# EAGLE board AMS Segment rev16 (EAGLE 9.6.2), part 1 of 2
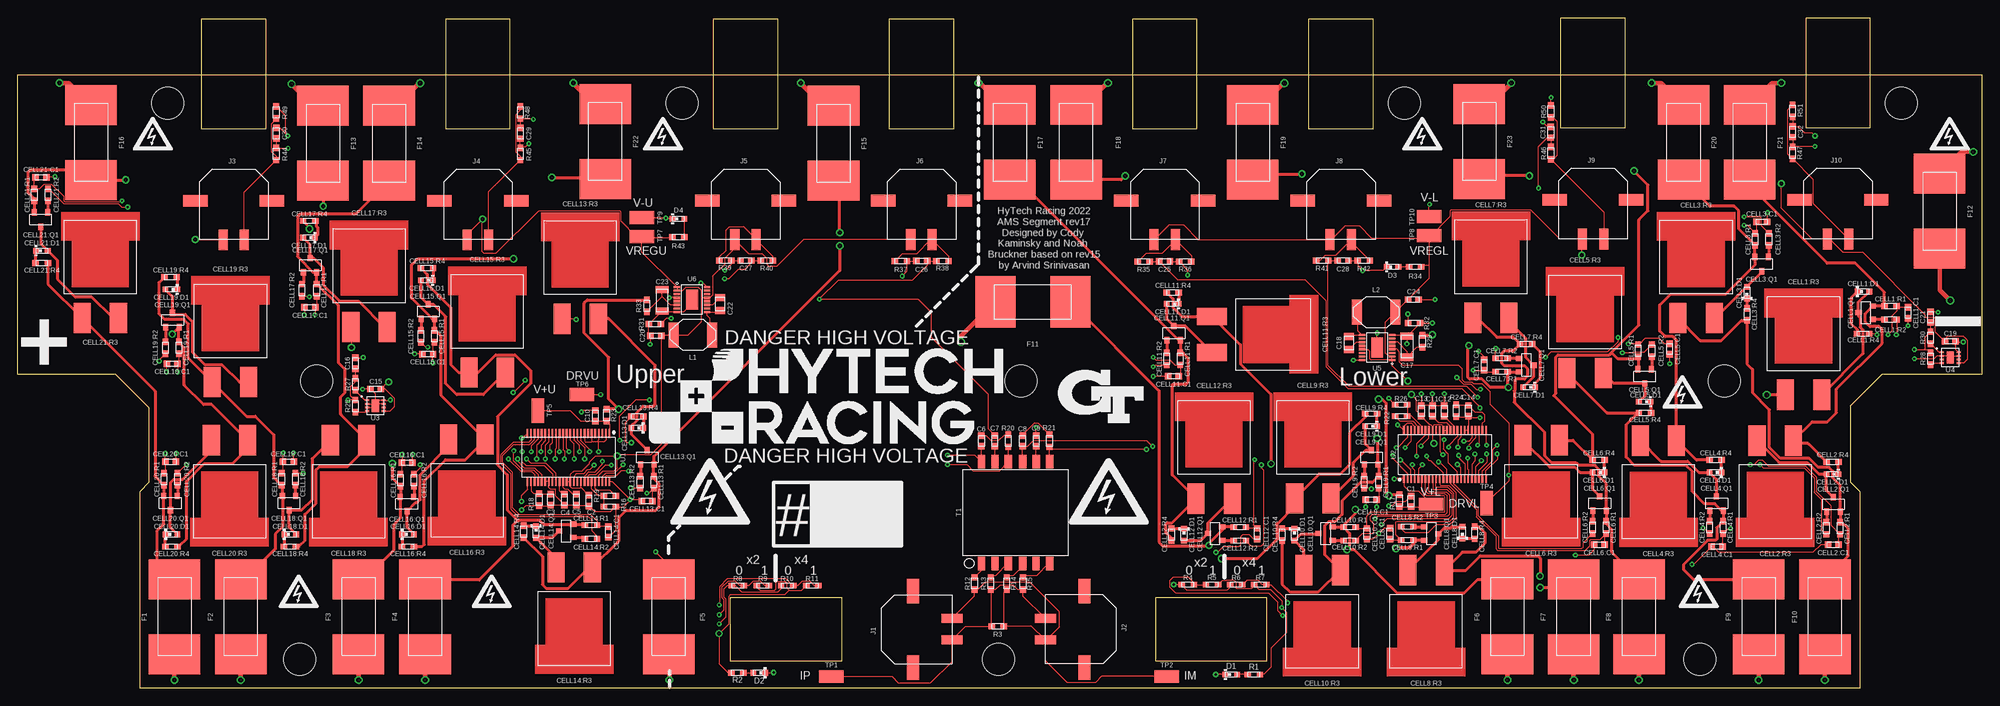
[diagram p0: board, top side]
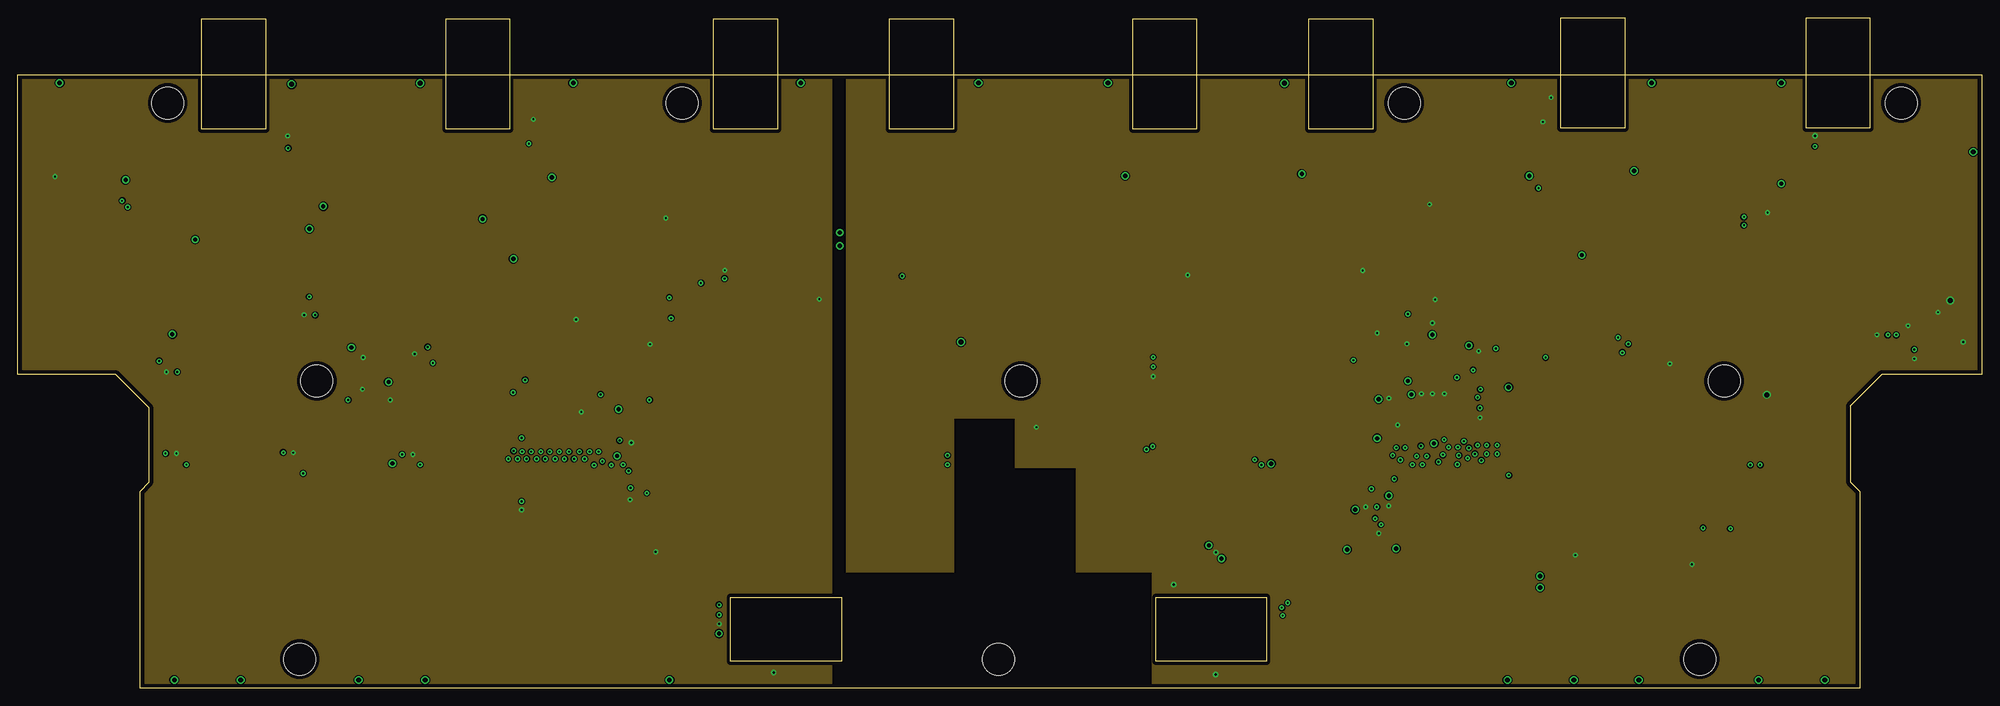
[diagram p1: board, inner layer Route2]
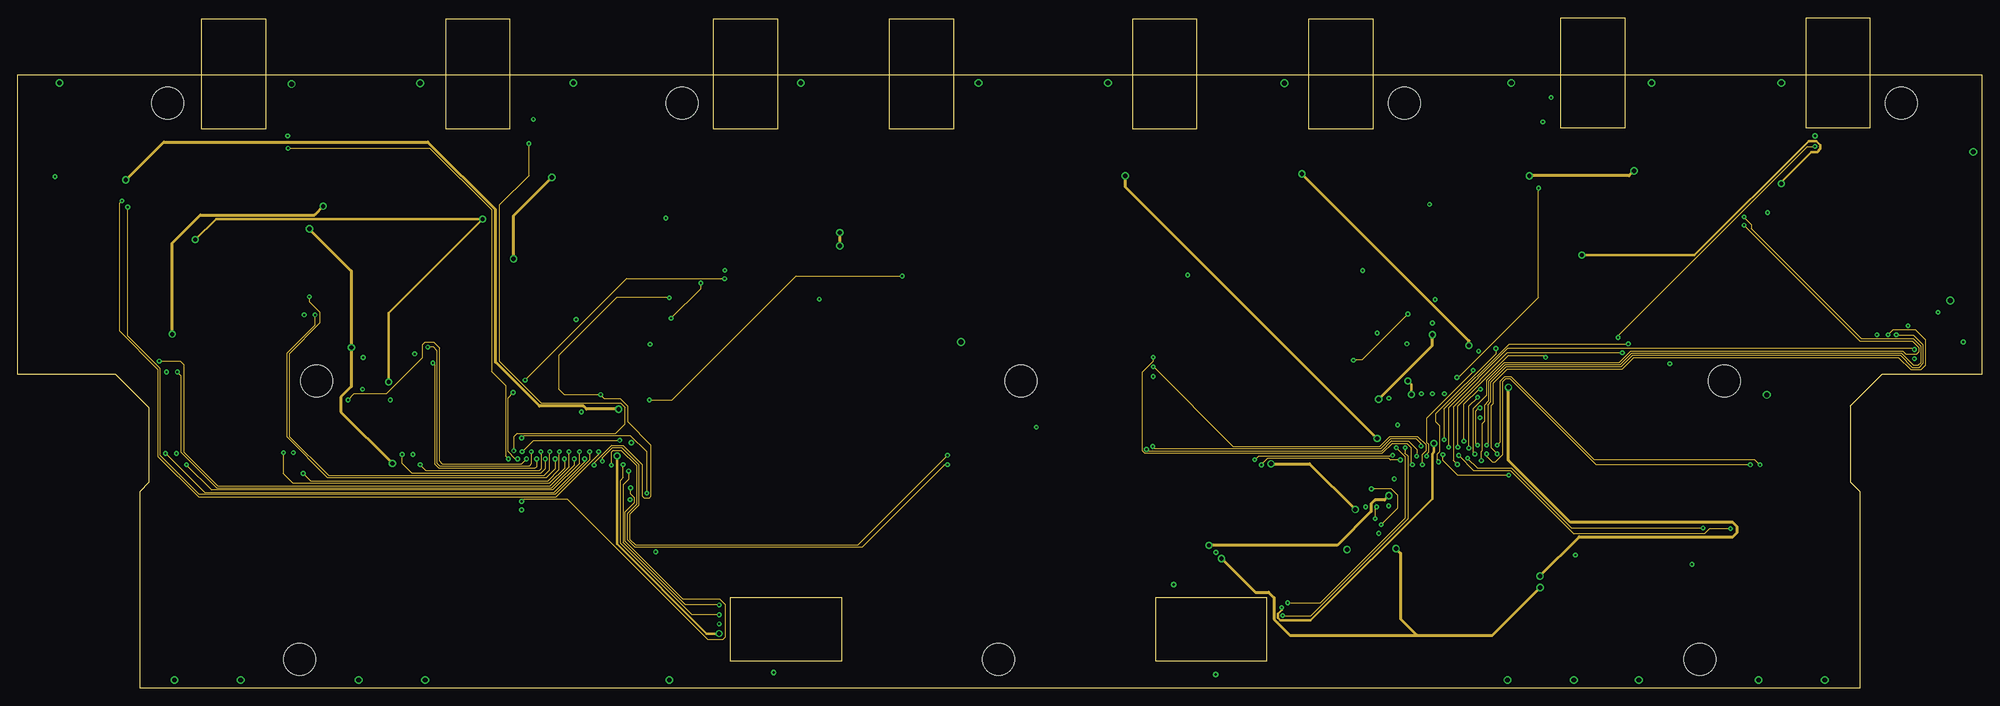
[diagram p2: board, inner layer Route15]
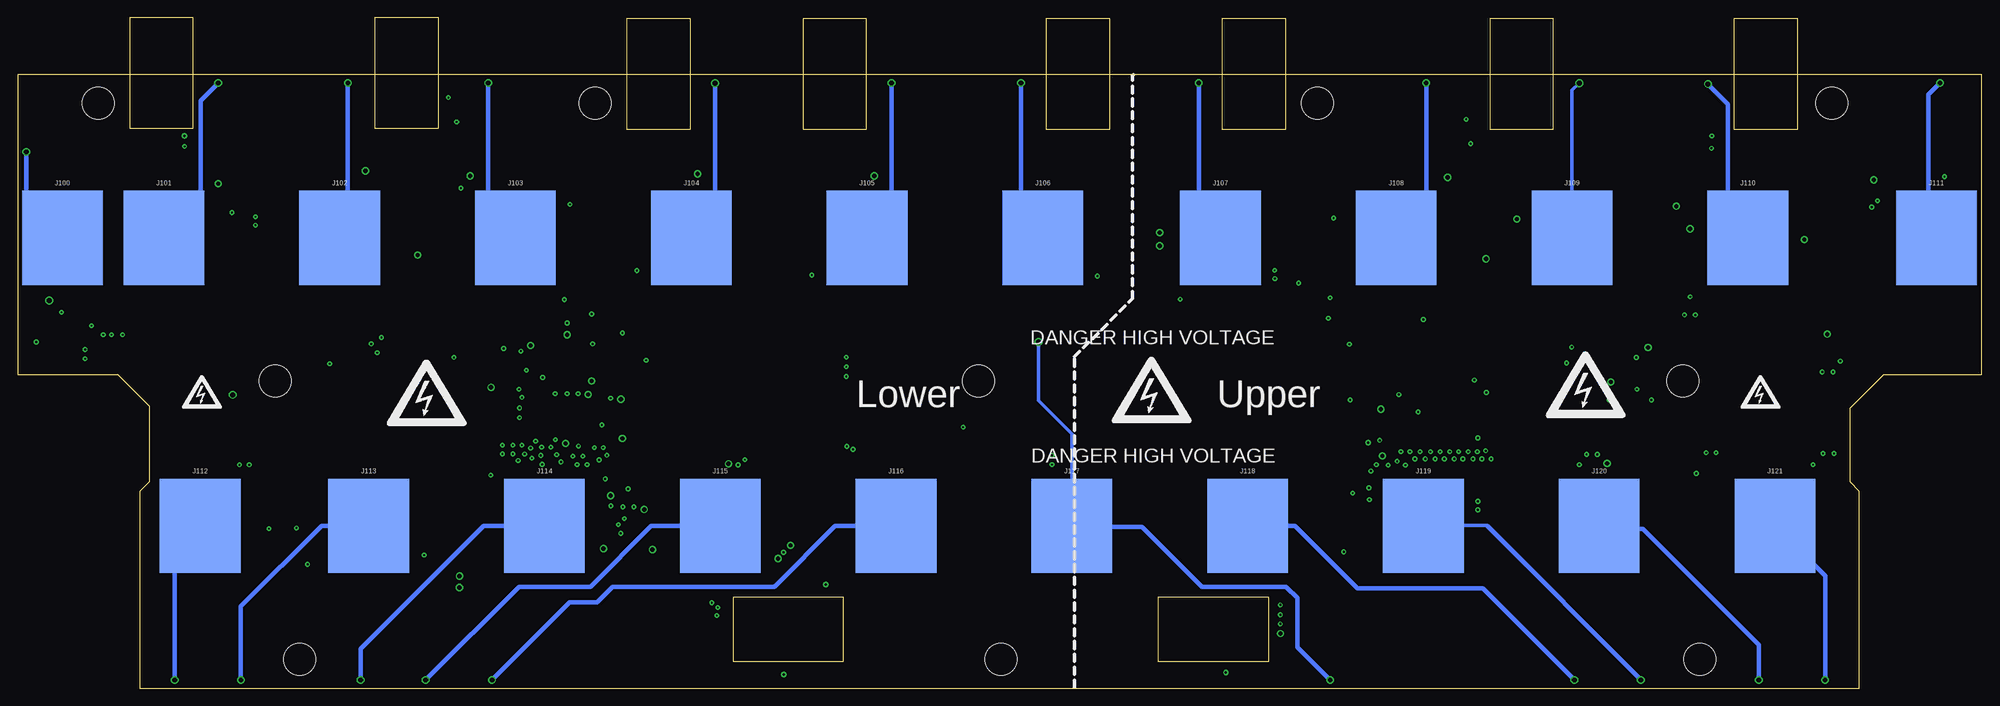
[diagram p3: board, bottom side, seen from below]

Size 275.23 x 85.98 mm. Coordinates in mm from the lower left corner, seen from the top.
Outline: 17.14,0 17.14,27.58 18.44,28.88 18.44,39.27 13.74,43.99 0,43.99 0,85.98 275.23,85.98 275.23,43.99 261.26,43.99 256.84,39.52 256.84,28.88 258.14,27.58 258.14,0 17.14,0
Copper layers (1+2*15+16): Top 0.0178mm / dielectric 12mil / Route2 0.0356mm / dielectric 28mil / Route15 0.0356mm / dielectric 12mil / Bottom 0.0178mm
Design rules "Sunstone Circuits (4 Layer)": minimum track width 6mil, minimum drill 8mil, track to track 6mil, track to pad 6mil, pad to pad 6mil, via to via 6mil, smd to smd 6mil, copper to edge 20mil, drill to drill 16mil, minimum pad ring 8mil, minimum via ring 8mil, stop-mask expansion 3mil, vias tented up to drill 30mil, thermal gap 10mil
Net classes: 1 Upper_Unfused: width 0.508 mm, drill 0.686 mm, clearance 1.6 mm to class 0, clearance 1.6 mm; 2 Lower_Unfused: width 0.508 mm, drill 0.686 mm, clearance 1.6 mm to class 0, clearance 1.6 mm to class 1, clearance 1.6 mm; 3 Upper Power: clearance 1.6 mm to class 1, clearance 1.6 mm to class 2; 4 Lower Power: clearance 1.6 mm to class 1, clearance 1.6 mm to class 2, clearance 1.6 mm to class 3; 5 IsoSPI: clearance 1.6 mm to class 1, clearance 1.6 mm to class 2, clearance 1.6 mm to class 3, clearance 1.6 mm to class 4

## Footprints (pad centres in the part's own frame; a part is rotated, then mirrored left to right if it is on the bottom)
0603-CAP = smd 0.9 x 0.9: 1 -0.75,0; 2 0.75,0
1206-CAP = smd 1 x 1.8: 1 -1.5,0; 2 1.5,0
0805-CAP = smd 0.95 x 1.4: 1 -0.925,0; 2 0.925,0
0603-LED = smd 0.8 x 0.8: 1 -0.825,0; 2 0.825,0
SOT-23 = smd 0.711 x 0.889: 1 -0.94,-1.003; 2 0.94,-1.003; 3 0,1.003
0603-RES = smd 0.9 x 0.8: 1 -0.85,0; 2 0.85,0
PWR263 = smd 2.4 x 4.23: 1 -2.54,0; 2 2.54,0
0885 = smd 5.6 x 7.23: 1 -5.25,0; 2 5.25,0
MOLEX_MICROFIT_SMD_RIGHTANGLE_02_SINGLE = smd 1.27 x 2.921: 1 1.499,5.474; 2 -1.499,5.474 | smd 3.429 x 1.651: PAD 5.372,0; PAD2 -5.372,0
5222 = smd 11.303 x 13.208: 1 0,0
74451133 = smd 1.4 x 3.5: 1 -2.7,0; 2 2.7,0
HM2112ZNLT = smd 1.02 x 1.89: 1 -4.78,-7.145; 2 -2.89,-7.145; 3 -1,-7.145; 4 1,-7.145; 5 2.875,-7.145; 6 4.78,-7.145; 7 4.78,7.145; 8 2.89,7.145; 9 1,7.145; 10 -1,7.145; 11 -2.89,7.145; 12 -4.78,7.145
MICRO_MINIATURE = smd 3.429 x 1.778: 1 0,0
SSOP-48 = smd 0.25 x 1.25: 1 -5.75,-3.37; 2 -5.25,-3.37; 3 -4.75,-3.37; 4 -4.25,-3.37; 5 -3.75,-3.37; 6 -3.25,-3.37; 7 -2.75,-3.37; 8 -2.25,-3.37; 9 -1.75,-3.37; 10 -1.25,-3.37; 11 -0.75,-3.37; 12 -0.25,-3.37; 13 0.25,-3.37; 14 0.75,-3.37; 15 1.25,-3.37; 16 1.75,-3.37; 17 2.25,-3.37; 18 2.75,-3.37; 19 3.25,-3.37; 20 3.75,-3.37; 21 4.25,-3.37; 22 4.75,-3.37; 23 5.25,-3.37; 24 5.75,-3.37; 25 5.75,3.38; 26 5.25,3.38; 27 4.75,3.38; 28 4.25,3.38; 29 3.75,3.38; 30 3.25,3.38; 31 2.75,3.38; 32 2.25,3.38; 33 1.75,3.38; 34 1.25,3.38; 35 0.75,3.38; 36 0.25,3.38; 37 -0.25,3.38; 38 -0.75,3.38; 39 -1.25,3.38; 40 -1.75,3.38; 41 -2.25,3.38; 42 -2.75,3.38; 43 -3.25,3.38; 44 -3.75,3.38; 45 -4.25,3.38; 46 -4.75,3.38; 47 -5.25,3.38; 48 -5.75,3.38
DFN-8 = smd 0.55 x 0.25: 1 -1.175,0.75; 2 -1.175,0.25; 3 -1.175,-0.25; 4 -1.175,-0.75; 5 1.175,-0.75; 6 1.175,-0.25; 7 1.175,0.25; 8 1.175,0.75 | smd 1 x 1.7: PAD 0,0
MSOP-16(MSE) = smd 0.305 x 0.889: 1 -1.75,-2.106; 2 -1.25,-2.106; 3 -0.75,-2.106; 4 -0.25,-2.106; 5 0.25,-2.106; 6 0.75,-2.106; 7 1.25,-2.106; 8 1.75,-2.106; 9 1.75,2.106; 10 1.25,2.106; 11 0.75,2.106; 12 0.25,2.106; 13 -0.25,2.106; 14 -0.75,2.106; 15 -1.25,2.106; 16 -1.75,2.106 | smd 2.845 x 1.651: 17 0,0
MOUNTING_M4 = hole 4.5: 0,0

## Placement (x,y rotation side)
C1  CAPACITOR_0603_100V_0.1UF  [0603-CAP]  195.25,26.19 90 top
C2  CAPACITOR_0603_10V_22UF  [0603-CAP]  80.01,26.29 270 top
C3  CAPACITOR_0603_100V_10NF  [0603-CAP]  74.67,26.42 270 top
C4  CAPACITOR_0603_10V_1UF  [0603-CAP]  76.61,26.42 270 top
C5  CAPACITOR_0603_10V_1UF  [0603-CAP]  78.3,26.42 270 top
C6  CAPACITOR_0603_10V_15PF  [0603-CAP]  135.05,34.66 270 top
C7  CAPACITOR_0603_10V_10NF  [0603-CAP]  136.93,34.66 270 top
C8  CAPACITOR_0603_10V_15PF  [0603-CAP]  140.82,34.66 270 top
C9  CAPACITOR_0603_10V_10NF  [0603-CAP]  142.72,34.66 270 top
C10  CAPACITOR_0603_100V_0.1UF  [0603-CAP]  80.92,38.18 90 top
C11  CAPACITOR_0603_10V_1UF  [0603-CAP]  198.26,38.85 90 top
C12  CAPACITOR_0603_10V_1UF  [0603-CAP]  199.92,38.85 90 top
C13  CAPACITOR_0603_10V_1UF  [0603-CAP]  196.7,38.86 90 top
C14  CAPACITOR_0603_100V_10NF  [0603-CAP]  203.3,38.87 270 top
C15  CAPACITOR_0603_10V_0.1UF  [0603-CAP]  50.14,41.94 180 top
C16  CAPACITOR_0603_10V_3.3NF  [0603-CAP]  47.31,45.54 90 top
C17  CAPACITOR_1206_100V_2.2UF  [1206-CAP]  194.69,47.88 90 top
C18  CAPACITOR_0805_100V_0.22UF  [0805-CAP]  186.56,48.39 90 top
C19  CAPACITOR_0603_10V_0.1UF  [0603-CAP]  270.84,48.62 0 top
C20  CAPACITOR_0603_10V_1UF  [0603-CAP]  89.41,49.4 180 top
C21  CAPACITOR_0603_10V_3.3NF  [0603-CAP]  268.07,52.02 90 top
C22  CAPACITOR_0805_100V_0.22UF  [0805-CAP]  98.42,53.85 270 top
C23  CAPACITOR_1206_100V_2.2UF  [1206-CAP]  90.3,54.36 270 top
C24  CAPACITOR_0603_10V_22UF  [0603-CAP]  195.58,54.48 0 top
C25  CAPACITOR_0603_100V_10NF  [0603-CAP]  160.72,59.82 0 top
C26  CAPACITOR_0603_100V_10NF  [0603-CAP]  126.68,59.88 0 top
C27  CAPACITOR_0603_100V_10NF  [0603-CAP]  102.04,59.94 180 top
C28  CAPACITOR_0603_100V_10NF  [0603-CAP]  185.74,59.94 0 top
C29  CAPACITOR_0603_100V_10NF  [0603-CAP]  70.42,77.79 90 top
C30  CAPACITOR_0603_100V_10NF  [0603-CAP]  36.22,77.8 90 top
C31  CAPACITOR_0603_100V_10NF  [0603-CAP]  214.85,77.93 90 top
C32  CAPACITOR_0603_100V_10NF  [0603-CAP]  248.74,78 270 top
CELL1:C1  CAPACITOR_0603_100V_10NF  [0603-CAP]  264.9,52.63 270 top
CELL1:D1  LED_0603_RED  [0603-LED]  258.65,55.6 0 top
CELL1:Q1  TRANSISTOR_P_MOS_SOT23_SI2369DS-T1-GE3  [SOT-23]  258.98,52.65 90 top
CELL1:R1  RESISTOR_0603_100  [0603-RES]  262.46,53.57 0 top
CELL1:R2  RESISTOR_0603_1K  [0603-RES]  262.46,51.66 0 top
CELL1:R3  RESISTOR_PWR263_7.5  [PWR263]  250.27,41.12 0 top
CELL1:R4  RESISTOR_0603_1K  [0603-RES]  258.62,49.68 180 top
CELL2:C1  CAPACITOR_0603_100V_10NF  [0603-CAP]  254.43,20.09 180 top
CELL2:D1  LED_0603_RED  [0603-LED]  254.3,30 180 top
CELL2:Q1  TRANSISTOR_P_MOS_SOT23_SI2369DS-T1-GE3  [SOT-23]  254.46,25.76 0 top
CELL2:R1  RESISTOR_0603_100  [0603-RES]  255.37,22.4 270 top
CELL2:R2  RESISTOR_0603_1K  [0603-RES]  253.47,22.4 270 top
CELL2:R3  RESISTOR_PWR263_7.5  [PWR263]  246.3,34.7 180 top
CELL2:R4  RESISTOR_0603_1K  [0603-RES]  254.33,31.72 0 top
CELL3:C1  CAPACITOR_0603_100V_10NF  [0603-CAP]  244.42,65.38 0 top
CELL3:D1  LED_0603_RED  [0603-LED]  242.34,55.45 90 top
CELL3:Q1  TRANSISTOR_P_MOS_SOT23_SI2369DS-T1-GE3  [SOT-23]  244.4,59.46 180 top
CELL3:R1  RESISTOR_0603_100  [0603-RES]  243.48,62.94 90 top
CELL3:R2  RESISTOR_0603_1K  [0603-RES]  245.39,62.94 90 top
CELL3:R3  RESISTOR_PWR263_7.5  [PWR263]  235.2,51.87 0 top
CELL3:R4  RESISTOR_0603_1K  [0603-RES]  242.34,52.4 90 top
CELL4:C1  CAPACITOR_0603_100V_10NF  [0603-CAP]  238.15,19.84 180 top
CELL4:D1  LED_0603_RED  [0603-LED]  237.92,30.25 180 top
CELL4:Q1  TRANSISTOR_P_MOS_SOT23_SI2369DS-T1-GE3  [SOT-23]  238.07,25.88 0 top
CELL4:R1  RESISTOR_0603_100  [0603-RES]  238.99,22.53 270 top
CELL4:R2  RESISTOR_0603_1K  [0603-RES]  237.08,22.53 270 top
CELL4:R3  RESISTOR_PWR263_7.5  [PWR263]  229.92,34.7 180 top
CELL4:R4  RESISTOR_0603_1K  [0603-RES]  237.95,31.98 0 top
CELL5:C1  CAPACITOR_0603_100V_10NF  [0603-CAP]  231.5,47.55 270 top
CELL5:D1  LED_0603_RED  [0603-LED]  228.02,40.16 180 top
CELL5:Q1  TRANSISTOR_P_MOS_SOT23_SI2369DS-T1-GE3  [SOT-23]  228.02,43.71 180 top
CELL5:R1  RESISTOR_0603_100  [0603-RES]  227.1,47.32 90 top
CELL5:R2  RESISTOR_0603_1K  [0603-RES]  229.01,47.32 90 top
CELL5:R3  RESISTOR_PWR263_7.5  [PWR263]  219.66,44.17 0 top
CELL5:R4  RESISTOR_0603_1K  [0603-RES]  228.04,38.58 0 top
CELL6:C1  CAPACITOR_0603_100V_10NF  [0603-CAP]  221.67,20.09 180 top
CELL6:D1  LED_0603_RED  [0603-LED]  221.54,30.25 180 top
CELL6:Q1  TRANSISTOR_P_MOS_SOT23_SI2369DS-T1-GE3  [SOT-23]  221.69,25.88 0 top
CELL6:R1  RESISTOR_0603_100  [0603-RES]  222.61,22.53 270 top
CELL6:R2  RESISTOR_0603_1K  [0603-RES]  220.7,22.53 270 top
CELL6:R3  RESISTOR_PWR263_7.5  [PWR263]  213.49,34.75 180 top
CELL6:R4  RESISTOR_0603_1K  [0603-RES]  221.56,31.98 0 top
CELL7:C1  CAPACITOR_0603_100V_10NF  [0603-CAP]  205.51,45.29 90 top
CELL7:D1  LED_0603_RED  [0603-LED]  211.81,42.19 180 top
CELL7:Q1  TRANSISTOR_P_MOS_SOT23_SI2369DS-T1-GE3  [SOT-23]  211.43,45.26 270 top
CELL7:R1  RESISTOR_0603_100  [0603-RES]  207.95,44.35 180 top
CELL7:R2  RESISTOR_0603_1K  [0603-RES]  207.95,46.25 180 top
CELL7:R3  RESISTOR_PWR263_7.5  [PWR263]  206.45,51.92 0 top
CELL7:R4  RESISTOR_0603_1K  [0603-RES]  211.4,48.23 0 top
CELL8:C1  CAPACITOR_0603_100V_10NF  [0603-CAP]  192.3,21.67 90 top
CELL8:D1  LED_0603_RED  [0603-LED]  202.46,21.79 90 top
CELL8:Q1  TRANSISTOR_P_MOS_SOT23_SI2369DS-T1-GE3  [SOT-23]  198.09,21.64 270 top
CELL8:R1  RESISTOR_0603_100  [0603-RES]  194.74,20.73 180 top
CELL8:R2  RESISTOR_0603_1K  [0603-RES]  194.74,22.63 180 top
CELL8:R3  RESISTOR_PWR263_7.5  [PWR263]  197.37,16.54 180 top
CELL8:R4  RESISTOR_0603_1K  [0603-RES]  204.19,21.77 270 top
CELL9:C1  CAPACITOR_0603_100V_10NF  [0603-CAP]  189.66,26.44 180 top
CELL9:D1  LED_0603_RED  [0603-LED]  189.66,36.73 180 top
CELL9:Q1  TRANSISTOR_P_MOS_SOT23_SI2369DS-T1-GE3  [SOT-23]  189.69,32.36 0 top
CELL9:R1  RESISTOR_0603_100  [0603-RES]  190.73,28.88 270 top
CELL9:R2  RESISTOR_0603_1K  [0603-RES]  188.7,28.88 270 top
CELL9:R3  RESISTOR_PWR263_7.5  [PWR263]  181.48,26.59 0 top
CELL9:R4  RESISTOR_0603_1K  [0603-RES]  189.69,38.46 0 top
CELL10:C1  CAPACITOR_0603_100V_10NF  [0603-CAP]  189.08,21.64 270 top
CELL10:D1  LED_0603_RED  [0603-LED]  178.92,21.51 270 top
CELL10:Q1  TRANSISTOR_P_MOS_SOT23_SI2369DS-T1-GE3  [SOT-23]  183.29,21.67 90 top
CELL10:R1  RESISTOR_0603_100  [0603-RES]  186.64,22.58 0 top
CELL10:R2  RESISTOR_0603_1K  [0603-RES]  186.64,20.68 0 top
CELL10:R3  RESISTOR_PWR263_7.5  [PWR263]  182.8,16.54 180 top
CELL10:R4  RESISTOR_0603_1K  [0603-RES]  177.19,21.54 90 top
CELL11:C1  CAPACITOR_0603_100V_10NF  [0603-CAP]  161.98,43.71 180 top
CELL11:D1  LED_0603_RED  [0603-LED]  161.85,53.87 180 top
CELL11:Q1  TRANSISTOR_P_MOS_SOT23_SI2369DS-T1-GE3  [SOT-23]  162,49.76 0 top
CELL11:R1  RESISTOR_0603_100  [0603-RES]  162.92,46.15 270 top
CELL11:R2  RESISTOR_0603_1K  [0603-RES]  161.01,46.15 270 top
CELL11:R3  RESISTOR_PWR263_7.5  [PWR263]  167.36,49.58 270 top
CELL11:R4  RESISTOR_0603_1K  [0603-RES]  161.87,55.47 0 top
CELL12:C1  CAPACITOR_0603_100V_10NF  [0603-CAP]  173.71,21.64 270 top
CELL12:D1  LED_0603_RED  [0603-LED]  163.42,21.51 270 top
CELL12:Q1  TRANSISTOR_P_MOS_SOT23_SI2369DS-T1-GE3  [SOT-23]  167.79,21.67 90 top
CELL12:R1  RESISTOR_0603_100  [0603-RES]  171.27,22.58 0 top
CELL12:R2  RESISTOR_0603_1K  [0603-RES]  171.27,20.68 0 top
CELL12:R3  RESISTOR_PWR263_7.5  [PWR263]  167.67,26.57 0 top
CELL12:R4  RESISTOR_0603_1K  [0603-RES]  161.7,21.54 90 top
CELL13:C1  CAPACITOR_0603_100V_10NF  [0603-CAP]  88.19,26.24 180 top
CELL13:D1  LED_0603_RED  [0603-LED]  86.79,36.47 180 top
CELL13:Q1  TRANSISTOR_P_MOS_SOT23_SI2369DS-T1-GE3  [SOT-23]  88.21,32.36 0 top
CELL13:R1  RESISTOR_0603_100  [0603-RES]  89.13,28.88 270 top
CELL13:R2  RESISTOR_0603_1K  [0603-RES]  87.22,28.88 270 top
CELL13:R3  RESISTOR_PWR263_7.5  [PWR263]  78.82,51.79 0 top
CELL13:R4  RESISTOR_0603_1K  [0603-RES]  86.82,38.07 0 top
CELL14:C1  CAPACITOR_0603_100V_10NF  [0603-CAP]  82.78,21.89 270 top
CELL14:D1  LED_0603_RED  [0603-LED]  72.62,21.89 270 top
CELL14:Q1  TRANSISTOR_P_MOS_SOT23_SI2369DS-T1-GE3  [SOT-23]  76.86,22.05 90 top
CELL14:R1  RESISTOR_0603_100  [0603-RES]  80.34,22.83 0 top
CELL14:R2  RESISTOR_0603_1K  [0603-RES]  80.34,20.93 0 top
CELL14:R3  RESISTOR_PWR263_7.5  [PWR263]  77.98,16.92 180 top
CELL14:R4  RESISTOR_0603_1K  [0603-RES]  70.89,21.92 90 top
CELL15:C1  CAPACITOR_0603_100V_10NF  [0603-CAP]  57.45,46.84 180 top
CELL15:D1  LED_0603_RED  [0603-LED]  57.33,57.18 180 top
CELL15:Q1  TRANSISTOR_P_MOS_SOT23_SI2369DS-T1-GE3  [SOT-23]  57.48,52.81 0 top
CELL15:R1  RESISTOR_0603_100  [0603-RES]  58.39,49.33 270 top
CELL15:R2  RESISTOR_0603_1K  [0603-RES]  56.49,49.33 270 top
CELL15:R3  RESISTOR_PWR263_7.5  [PWR263]  65.79,44.25 0 top
CELL15:R4  RESISTOR_0603_1K  [0603-RES]  57.35,58.9 0 top
CELL16:C1  CAPACITOR_0603_100V_10NF  [0603-CAP]  54.56,31.6 0 top
CELL16:D1  LED_0603_RED  [0603-LED]  54.69,21.56 0 top
CELL16:Q1  TRANSISTOR_P_MOS_SOT23_SI2369DS-T1-GE3  [SOT-23]  54.53,25.81 180 top
CELL16:R1  RESISTOR_0603_100  [0603-RES]  53.62,29.16 90 top
CELL16:R2  RESISTOR_0603_1K  [0603-RES]  55.52,29.16 90 top
CELL16:R3  RESISTOR_PWR263_7.5  [PWR263]  62.94,34.87 180 top
CELL16:R4  RESISTOR_0603_1K  [0603-RES]  54.66,19.84 180 top
CELL17:C1  CAPACITOR_0603_100V_10NF  [0603-CAP]  40.94,53.37 180 top
CELL17:D1  LED_0603_RED  [0603-LED]  40.82,63.17 180 top
CELL17:Q1  TRANSISTOR_P_MOS_SOT23_SI2369DS-T1-GE3  [SOT-23]  40.97,59.28 0 top
CELL17:R1  RESISTOR_0603_100  [0603-RES]  41.88,55.8 270 top
CELL17:R2  RESISTOR_0603_1K  [0603-RES]  39.83,55.8 270 top
CELL17:R3  RESISTOR_PWR263_7.5  [PWR263]  49.23,50.65 0 top
CELL17:R4  RESISTOR_0603_1K  [0603-RES]  40.84,65.51 0 top
CELL18:C1  CAPACITOR_0603_100V_10NF  [0603-CAP]  37.92,31.72 0 top
CELL18:D1  LED_0603_RED  [0603-LED]  38.18,21.56 0 top
CELL18:Q1  TRANSISTOR_P_MOS_SOT23_SI2369DS-T1-GE3  [SOT-23]  38.02,25.93 180 top
CELL18:R1  RESISTOR_0603_100  [0603-RES]  36.98,29.29 90 top
CELL18:R2  RESISTOR_0603_1K  [0603-RES]  38.89,29.29 90 top
CELL18:R3  RESISTOR_PWR263_7.5  [PWR263]  46.36,34.75 180 top
CELL18:R4  RESISTOR_0603_1K  [0603-RES]  38.15,19.84 180 top
CELL19:C1  CAPACITOR_0603_100V_10NF  [0603-CAP]  21.64,45.49 180 top
CELL19:D1  LED_0603_RED  [0603-LED]  21.51,55.91 180 top
CELL19:Q1  TRANSISTOR_P_MOS_SOT23_SI2369DS-T1-GE3  [SOT-23]  21.67,51.61 0 top
CELL19:R1  RESISTOR_0603_100  [0603-RES]  22.58,47.73 270 top
CELL19:R2  RESISTOR_0603_1K  [0603-RES]  20.68,47.73 270 top
CELL19:R3  RESISTOR_PWR263_7.5  [PWR263]  29.79,42.9 0 top
CELL19:R4  RESISTOR_0603_1K  [0603-RES]  21.41,57.63 0 top
CELL20:C1  CAPACITOR_0603_100V_10NF  [0603-CAP]  21.41,31.72 0 top
CELL20:D1  LED_0603_RED  [0603-LED]  21.54,21.56 0 top
CELL20:Q1  TRANSISTOR_P_MOS_SOT23_SI2369DS-T1-GE3  [SOT-23]  21.39,25.93 180 top
CELL20:R1  RESISTOR_0603_100  [0603-RES]  20.47,29.29 90 top
CELL20:R2  RESISTOR_0603_1K  [0603-RES]  22.38,29.29 90 top
CELL20:R3  RESISTOR_PWR263_7.5  [PWR263]  29.67,34.75 180 top
CELL20:R4  RESISTOR_0603_1K  [0603-RES]  21.51,19.84 180 top
CELL21:C1  CAPACITOR_0603_100V_10NF  [0603-CAP]  3.25,71.6 0 top
CELL21:D1  LED_0603_RED  [0603-LED]  3.38,61.32 0 top
CELL21:Q1  TRANSISTOR_P_MOS_SOT23_SI2369DS-T1-GE3  [SOT-23]  3.23,65.68 180 top
CELL21:R1  RESISTOR_0603_100  [0603-RES]  2.31,69.16 90 top
CELL21:R2  RESISTOR_0603_1K  [0603-RES]  4.22,69.16 90 top
CELL21:R3  RESISTOR_PWR263_7.5  [PWR263]  11.56,51.87 0 top
CELL21:R4  RESISTOR_0603_1K  [0603-RES]  3.35,59.59 180 top
D1  LED_0603_BLUE  [0603-LED]  170.05,1.91 0 top
D2  LED_0603_BLUE  [0603-LED]  103.89,2.16 180 top
D3  LED_0603_BLUE  [0603-LED]  192.66,59.05 0 top
D4  LED_0603_BLUE  [0603-LED]  92.58,65.79 0 top
F1  FUSE_0885_1  [0885]  21.97,9.99 90 top
F2  FUSE_0885_1  [0885]  31.24,9.99 90 top
F3  FUSE_0885_1  [0885]  47.75,9.99 90 top
F4  FUSE_0885_1  [0885]  57.09,9.99 90 top
F5  FUSE_0885_1  [0885]  91.21,9.99 90 top
F6  FUSE_0885_1  [0885]  208.76,9.99 90 top
F7  FUSE_0885_1  [0885]  218.04,9.99 90 top
F8  FUSE_0885_1  [0885]  227.2,9.99 90 top
F9  FUSE_0885_1  [0885]  243.98,9.99 90 top
F10  FUSE_0885_1  [0885]  253.26,9.99 90 top
F11  FUSE_0885_1  [0885]  142.25,54.15 0 top
F12  FUSE_0885_1  [0885]  269.34,66.85 270 top
F13  FUSE_0885_1  [0885]  42.77,76.39 270 top
F14  FUSE_0885_1  [0885]  52.04,76.39 270 top
F15  FUSE_0885_1  [0885]  114.33,76.39 270 top
F16  FUSE_0885_1  [0885]  10.26,76.5 270 top
F17  FUSE_0885_1  [0885]  139.04,76.52 270 top
F18  FUSE_0885_1  [0885]  148.31,76.52 270 top
F19  FUSE_0885_1  [0885]  173.08,76.52 270 top
F20  FUSE_0885_1  [0885]  233.45,76.52 270 top
F21  FUSE_0885_1  [0885]  242.72,76.52 270 top
F22  FUSE_0885_1  [0885]  82.32,76.64 270 top
F23  FUSE_0885_1  [0885]  204.83,76.64 270 top
J1  CONNECTOR-2_MICROFIT_SMD_RIGHTANGLE_02_SINGLE_BLACK  [MOLEX_MICROFIT_SMD_RIGHTANGLE_02_SINGLE]  125.45,8.25 270 top
J2  CONNECTOR-2_MICROFIT_SMD_RIGHTANGLE_02_SINGLE_BLACK  [MOLEX_MICROFIT_SMD_RIGHTANGLE_02_SINGLE]  149.48,8.25 90 top
J3  CONNECTOR-2_MICROFIT_SMD_RIGHTANGLE_02_SINGLE_BLACK  [MOLEX_MICROFIT_SMD_RIGHTANGLE_02_SINGLE]  30.25,68.33 180 top
J4  CONNECTOR-2_MICROFIT_SMD_RIGHTANGLE_02_SINGLE_BLACK  [MOLEX_MICROFIT_SMD_RIGHTANGLE_02_SINGLE]  64.48,68.33 180 top
J5  CONNECTOR-2_MICROFIT_SMD_RIGHTANGLE_02_SINGLE_BLACK  [MOLEX_MICROFIT_SMD_RIGHTANGLE_02_SINGLE]  101.98,68.36 180 top
J6  CONNECTOR-2_MICROFIT_SMD_RIGHTANGLE_02_SINGLE_BLACK  [MOLEX_MICROFIT_SMD_RIGHTANGLE_02_SINGLE]  126.64,68.36 180 top
J7  CONNECTOR-2_MICROFIT_SMD_RIGHTANGLE_02_SINGLE_BLACK  [MOLEX_MICROFIT_SMD_RIGHTANGLE_02_SINGLE]  160.73,68.36 180 top
J8  CONNECTOR-2_MICROFIT_SMD_RIGHTANGLE_02_SINGLE_BLACK  [MOLEX_MICROFIT_SMD_RIGHTANGLE_02_SINGLE]  185.42,68.36 180 top
J9  CONNECTOR-2_MICROFIT_SMD_RIGHTANGLE_02_SINGLE_BLACK  [MOLEX_MICROFIT_SMD_RIGHTANGLE_02_SINGLE]  220.76,68.45 180 top
J10  CONNECTOR-2_MICROFIT_SMD_RIGHTANGLE_02_SINGLE_BLACK  [MOLEX_MICROFIT_SMD_RIGHTANGLE_02_SINGLE]  255.09,68.45 180 top
J100  CONNECTOR-1_5222_  [5222]  268.99,63.12 0 bottom
J101  CONNECTOR-1_5222_  [5222]  254.76,63.12 0 bottom
J102  CONNECTOR-1_5222_  [5222]  230.12,63.12 0 bottom
J103  CONNECTOR-1_5222_  [5222]  205.49,63.12 0 bottom
J104  CONNECTOR-1_5222_  [5222]  180.85,63.12 0 bottom
J105  CONNECTOR-1_5222_  [5222]  156.21,63.12 0 bottom
J106  CONNECTOR-1_5222_  [5222]  131.57,63.12 0 bottom
J107  CONNECTOR-1_5222_  [5222]  106.68,63.12 0 bottom
J108  CONNECTOR-1_5222_  [5222]  82.04,63.12 0 bottom
J109  CONNECTOR-1_5222_  [5222]  57.4,63.12 0 bottom
J110  CONNECTOR-1_5222_  [5222]  32.77,63.12 0 bottom
J111  CONNECTOR-1_5222_  [5222]  6.35,63.12 0 bottom
J112  CONNECTOR-1_5222_  [5222]  249.68,22.73 0 bottom
J113  CONNECTOR-1_5222_  [5222]  226.06,22.73 0 bottom
J114  CONNECTOR-1_5222_  [5222]  201.42,22.73 0 bottom
J115  CONNECTOR-1_5222_  [5222]  176.78,22.73 0 bottom
J116  CONNECTOR-1_5222_  [5222]  152.15,22.73 0 bottom
J117  CONNECTOR-1_5222_  [5222]  127.51,22.73 0 bottom
J118  CONNECTOR-1_5222_  [5222]  102.87,22.73 0 bottom
J119  CONNECTOR-1_5222_  [5222]  78.23,22.73 0 bottom
J120  CONNECTOR-1_5222_  [5222]  53.59,22.73 0 bottom
J121  CONNECTOR-1_5222_  [5222]  28.96,22.73 0 bottom
L1  INDUCTOR_74451133_33UH  [74451133]  94.61,49.53 180 top
L2  INDUCTOR_74451133_33UH  [74451133]  190.37,52.7 0 top
R1  RESISTOR_0603_1K  [0603-RES]  173.23,1.91 0 top
R2  RESISTOR_0603_1K  [0603-RES]  100.84,2.16 180 top
R3  RESISTOR_0603_DNP  [0603-RES]  137.34,8.66 180 top
R4  RESISTOR_0603_DNP  [0603-RES]  163.98,14.51 0 top
R5  RESISTOR_0603_DNP  [0603-RES]  167.37,14.51 0 top
R6  RESISTOR_0603_DNP  [0603-RES]  170.76,14.51 0 top
R7  RESISTOR_0603_DNP  [0603-RES]  174.14,14.51 0 top
R8  RESISTOR_0603_DNP  [0603-RES]  100.91,14.36 0 top
R9  RESISTOR_0603_DNP  [0603-RES]  104.43,14.36 0 top
R10  RESISTOR_0603_DNP  [0603-RES]  107.81,14.36 0 top
R11  RESISTOR_0603_DNP  [0603-RES]  111.33,14.36 0 top
R12  RESISTOR_0603_22  [0603-RES]  134.09,14.68 90 top
R13  RESISTOR_0603_22  [0603-RES]  136.35,14.68 90 top
R14  RESISTOR_0603_22  [0603-RES]  138.61,14.68 90 top
R15  RESISTOR_0603_22  [0603-RES]  140.87,14.68 90 top
R16  RESISTOR_0603_1K  [0603-RES]  82.98,25.43 180 top
R17  RESISTOR_0603_100  [0603-RES]  193.62,26.29 90 top
R18  RESISTOR_0603_100  [0603-RES]  73.05,26.42 90 top
R19  RESISTOR_0603_1K  [0603-RES]  82.98,26.95 180 top
R20  RESISTOR_0603_402  [0603-RES]  138.81,34.66 270 top
R21  RESISTOR_0603_402  [0603-RES]  144.6,34.66 270 top
R22  RESISTOR_0603_1K  [0603-RES]  193.87,38.13 180 top
R23  RESISTOR_0603_100  [0603-RES]  82.52,38.28 270 top
R24  RESISTOR_0603_100  [0603-RES]  201.57,38.87 90 top
R25  RESISTOR_0603_100  [0603-RES]  47.31,39.55 270 top
R26  RESISTOR_0603_1K  [0603-RES]  193.87,39.73 0 top
R27  RESISTOR_0603_DNP  [0603-RES]  47.31,42.6 270 top
R28  RESISTOR_0603_DNP  [0603-RES]  268.07,46.19 270 top
R29  RESISTOR_0603_470  [0603-RES]  196.85,48.64 270 top
R30  RESISTOR_0603_100  [0603-RES]  268.07,49.15 270 top
R31  RESISTOR_0603_374K  [0603-RES]  89.28,51.05 0 top
R32  RESISTOR_0603_374K  [0603-RES]  195.71,51.18 180 top
R33  RESISTOR_0603_470  [0603-RES]  88.14,53.59 270 top
R34  RESISTOR_0603_1K  [0603-RES]  195.83,59.05 0 top
R35  RESISTOR_0603_100  [0603-RES]  157.81,59.82 0 top
R36  RESISTOR_0603_2.74K  [0603-RES]  163.63,59.82 180 top
R37  RESISTOR_0603_100  [0603-RES]  123.77,59.88 0 top
R38  RESISTOR_0603_2.74K  [0603-RES]  129.59,59.88 180 top
R39  RESISTOR_0603_2.74K  [0603-RES]  99.14,59.94 0 top
R40  RESISTOR_0603_100  [0603-RES]  104.95,59.94 180 top
R41  RESISTOR_0603_100  [0603-RES]  182.83,59.94 0 top
R42  RESISTOR_0603_2.74K  [0603-RES]  188.65,59.94 180 top
R43  RESISTOR_0603_1K  [0603-RES]  92.58,63.25 180 top
R44  RESISTOR_0603_100  [0603-RES]  36.22,74.88 90 top
R45  RESISTOR_0603_100  [0603-RES]  70.42,74.88 90 top
R46  RESISTOR_0603_100  [0603-RES]  214.85,75.01 90 top
R47  RESISTOR_0603_100  [0603-RES]  248.74,75.06 270 top
R48  RESISTOR_0603_2.74K  [0603-RES]  70.42,80.7 270 top
R49  RESISTOR_0603_2.74K  [0603-RES]  36.22,80.72 90 top
R50  RESISTOR_0603_2.74K  [0603-RES]  214.85,80.85 90 top
R51  RESISTOR_0603_2.74K  [0603-RES]  248.74,80.92 90 top
T1  TRANSFORMER_HM2112ZNLT  [HM2112ZNLT]  139.83,24.61 0 top
TP1  TEST_POINT  [MICRO_MINIATURE]  114,1.63 0 top
TP2  TEST_POINT  [MICRO_MINIATURE]  160.99,1.63 0 top
TP3  TEST_POINT  [MICRO_MINIATURE]  198.09,25.81 180 top
TP4  TEST_POINT  [MICRO_MINIATURE]  205.84,25.96 270 top
TP5  TEST_POINT  [MICRO_MINIATURE]  72.87,38.91 270 top
TP6  TEST_POINT  [MICRO_MINIATURE]  79.04,41.17 180 top
TP7  TEST_POINT  [MICRO_MINIATURE]  87.45,63.31 0 top
TP8  TEST_POINT  [MICRO_MINIATURE]  197.79,63.44 180 top
TP9  TEST_POINT  [MICRO_MINIATURE]  87.45,65.98 0 top
TP10  TEST_POINT  [MICRO_MINIATURE]  197.79,66.1 180 top
U1  LTC6811-2  [SSOP-48]  77.17,32.36 180 top
U2  LTC6811-2  [SSOP-48]  200.03,32.73 0 top
U3  SHT31-ARP-B  [DFN-8]  50.11,39.6 0 top
U4  SHT31-ARP-B  [DFN-8]  270.84,46.33 0 top
U5  LT3990-5  [MSOP-16(MSE)]  190.5,47.75 90 top
U6  LT3990-5  [MSOP-16(MSE)]  94.49,54.48 270 top
U$1  [MOUNTING_M4]  39.5,4.06 0 top
U$2  [MOUNTING_M4]  137.41,4.06 0 top
U$3  [MOUNTING_M4]  235.71,4.06 0 top
U$4  [HV_0.50"]  39.37,13.59 0 top
U$5  [HV_0.50"]  66.42,13.59 0 top
U$6  [HV_0.50"]  235.59,13.59 0 top
U$7  [NUMBER]  105.92,19.94 0 top
U$8  [HV_1.00"]  97.03,27.56 0 top
U$9  [HV_1.00"]  152.91,27.56 0 top
U$10  [DANGER_HIGH_VOLTAGE]  116.08,32.64 0 top
U$11  [LOGO_HYTECH_LARGE]  88.39,34.29 0 top
U$12  [LOGO_GT_MEDIUM]  151.77,40.89 0 top
U$13  [HV_0.50"]  233.3,41.53 0 top
U$14  [MOUNTING_M4]  41.91,43.05 0 top
U$15  [MOUNTING_M4]  140.59,43.05 0 top
U$16  [MOUNTING_M4]  239.14,43.05 0 top
U$17  [DANGER_HIGH_VOLTAGE]  116.2,49.21 0 top
U$18  [HV_0.50"]  18.92,77.72 0 top
U$19  [HV_0.50"]  90.42,77.72 0 top
U$20  [HV_0.50"]  196.85,77.72 0 top
U$21  [HV_0.50"]  270.76,77.72 0 top
U$22  [MOUNTING_M4]  21.01,82.04 0 top
U$23  [MOUNTING_M4]  93.09,82.04 0 top
U$24  [MOUNTING_M4]  194.31,82.04 0 top
U$25  [MOUNTING_M4]  263.96,82.04 0 top
U$100  [HV_LARGE]  55.5,42.55 0 bottom
U$101  [HV_LARGE]  116.33,41.78 0 bottom
U$102  [HV_0.50"]  249.43,41.53 0 bottom
U$103  [HV_0.50"]  30.99,41.53 0 bottom
U$104  [HV_LARGE]  217.93,41.4 0 bottom

## Library data of the parts
C1 C10 = HyTechDevices; CAPACITANCE: 0.1µF; DKPN: 311-1523-1-ND; MANUFACTURER: Yageo; MOPN: 603-CC603KRX7R0BB104; MPN: CC0603KRX7R0BB104; TOLERANCE: 10%; VOLTAGE: 100V
C2 C24 = HyTechDevices; CAPACITANCE: 22µF; DKPN: 490-10476-1-ND; MANUFACTURER: Murata Electronics; MOPN: 81-GRM188R61A226ME5D; MPN: GRM188R61A226ME15D; TOLERANCE: 20%; VOLTAGE: 10V
C3 C14 C25-C32 CELL1:C1 CELL2:C1 CELL3:C1 CELL4:C1 CELL5:C1 CELL6:C1 CELL7:C1 CELL8:C1 CELL9:C1 CELL10:C1 CELL11:C1 CELL12:C1 CELL13:C1 CELL14:C1 CELL15:C1 CELL16:C1 CELL17:C1 CELL18:C1 CELL19:C1 CELL20:C1 CELL21:C1 = HyTechDevices; CAPACITANCE: 10nF; DKPN: 311-1788-1-ND; MANUFACTURER: Yageo; MOPN: 603-CC603KRX7R0BB103; MPN: CC0603KRX7R0BB103; TOLERANCE: 10%; VOLTAGE: 100V
C4 C5 C11-C13 C20 = HyTechDevices; CAPACITANCE: 1µF; DKPN: 311-1796-1-ND; MANUFACTURER: Yageo; MOPN: 603-CC603KRX7R6BB105; MPN: CC0603KRX7R6BB105; TOLERANCE: 10%; VOLTAGE: 10V
C6 C8 = HyTechDevices; CAPACITANCE: 15pF; DKPN: 720-VJ0603A150FXQPW1BCCT-ND; MANUFACTURER: Vishay Vitramon; MOPN: 77-VJ0603A150FXQPBC; MPN: VJ0603A150FXQPW1BC; TOLERANCE: 1%; VOLTAGE: 10V
C7 C9 = HyTechDevices; CAPACITANCE: 10nF; DKPN: 311-4054-1-ND; MANUFACTURER: Yageo; MOPN: 603-CC603KRX7R6BB103; MPN: CC0603KRX7R6BB103; TOLERANCE: 10%; VOLTAGE: 10V
C15 C19 = HyTechDevices; CAPACITANCE: 0.1µF; DKPN: 720-1688-1-ND; MANUFACTURER: Vishay Vitramon; MOPN: 77-VJ0603Y104JXQPBC; MPN: VJ0603Y104JXQPW1BC; TOLERANCE: 5%; VOLTAGE: 10V
C16 C21 = HyTechDevices; CAPACITANCE: 3.3nF; DKPN: 732-7759-1-ND; MANUFACTURER: Würth Elektronik; MOPN: 710-885012006016; MPN: 885012006016; TOLERANCE: 5%; VOLTAGE: 10V
C17 C23 = HyTechDevices; CAPACITANCE: 2.2µF; DKPN: 478-12144-1-ND; MANUFACTURER: AVX Corporation; MOPN: 581-12061C225K4T2A; MPN: 12061C225K4T2A; TOLERANCE: 10%; VOLTAGE: 100V
C18 C22 = HyTechDevices; CAPACITANCE: 0.22µF; DKPN: 399-8049-1-ND; MANUFACTURER: KEMET; MOPN: 80-C0805C224K1R; MPN: C0805C224K1RACTU; TOLERANCE: 10%; VOLTAGE: 100V
CELL1:D1 CELL2:D1 CELL3:D1 CELL4:D1 CELL5:D1 CELL6:D1 CELL7:D1 CELL8:D1 CELL9:D1 CELL10:D1 CELL11:D1 CELL12:D1 CELL13:D1 CELL14:D1 CELL15:D1 CELL16:D1 CELL17:D1 CELL18:D1 CELL19:D1 CELL20:D1 CELL21:D1 = HyTechDevices; COLOR: Red; DKPN: 754-1786-1-ND; MANUFACTURER: Kingbright; MOPN: 604-APT1608SECKJ3PRV; MPN: APT1608SECK/J3-PRV
CELL1:Q1 CELL2:Q1 CELL3:Q1 CELL4:Q1 CELL5:Q1 CELL6:Q1 CELL7:Q1 CELL8:Q1 CELL9:Q1 CELL10:Q1 CELL11:Q1 CELL12:Q1 CELL13:Q1 CELL14:Q1 CELL15:Q1 CELL16:Q1 CELL17:Q1 CELL18:Q1 CELL19:Q1 CELL20:Q1 CELL21:Q1 = HyTechDevices; DKPN: SI2369DS-T1-GE3CT-ND; MANUFACTURER: Vishay Siliconix; MOPN: 78-SI2369DS-T1-GE3; MPN: SI2369DS-T1-GE3
CELL1:R1 CELL2:R1 CELL3:R1 CELL4:R1 CELL5:R1 CELL6:R1 CELL7:R1 CELL8:R1 CELL9:R1 CELL10:R1 CELL11:R1 CELL12:R1 CELL13:R1 CELL14:R1 CELL15:R1 CELL16:R1 CELL17:R1 CELL18:R1 CELL19:R1 CELL20:R1 CELL21:R1 R17 R18 R23-R25 R30 R35 R37 R40 R41 R44-R47 = HyTechDevices; DKPN: 311-100HRCT-ND; MANUFACTURER: Yageo; MOPN: 603-RC0603FR-07100RL; MPN: RC0603FR-07100RL; POWER: 0.1W; RESISTANCE: 100; TOLERANCE: 1%; VOLTAGE_CONTINUOUS: 3.16V; VOLTAGE_MAX: 75V
CELL1:R2 CELL1:R4 CELL2:R2 CELL2:R4 CELL3:R2 CELL3:R4 CELL4:R2 CELL4:R4 CELL5:R2 CELL5:R4 CELL6:R2 CELL6:R4 CELL7:R2 CELL7:R4 CELL8:R2 CELL8:R4 CELL9:R2 CELL9:R4 CELL10:R2 CELL10:R4 CELL11:R2 CELL11:R4 CELL12:R2 CELL12:R4 CELL13:R2 CELL13:R4 CELL14:R2 CELL14:R4 CELL15:R2 CELL15:R4 CELL16:R2 CELL16:R4 CELL17:R2 CELL17:R4 CELL18:R2 CELL18:R4 CELL19:R2 CELL19:R4 CELL20:R2 CELL20:R4 CELL21:R2 CELL21:R4 R1 R2 R16 R19 R22 R26 R34 R43 = HyTechDevices; DKPN: 311-1.00KHRCT-ND; MANUFACTURER: Yageo; MOPN: 603-RC0603FR-071KL; MPN: RC0603FR-071KL; POWER: 0.1W; RESISTANCE: 1k; TOLERANCE: 1%; VOLTAGE_CONTINUOUS: 10.00V; VOLTAGE_MAX: 75V
CELL1:R3 CELL2:R3 CELL3:R3 CELL4:R3 CELL5:R3 CELL6:R3 CELL7:R3 CELL8:R3 CELL9:R3 CELL10:R3 CELL11:R3 CELL12:R3 CELL13:R3 CELL14:R3 CELL15:R3 CELL16:R3 CELL17:R3 CELL18:R3 CELL19:R3 CELL20:R3 CELL21:R3 = HyTechDevices; DKPN: PWR263S-35-7R50J-ND; MANUFACTURER: Bourns Inc.; MOPN: 652-PWR263S357R50J; MPN: PWR263S-35-7R50J; POWER: 3.5W; RESISTANCE: 7.5; TOLERANCE: 5%; VOLTAGE_CONTINUOUS: 5.123V; VOLTAGE_MAX: 5.123V
D1-D4 = HyTechDevices; COLOR: Blue; DKPN: 754-1789-1-ND; MANUFACTURER: Kingbright; MOPN: 604-APT1608VBC/D; MPN: APT1608VBC/D
F1-F23 = HyTechDevices; CURRENT: 1A; DKPN: F10985CT-ND; MANUFACTURER: Littelfuse Inc.; MOPN: 576-0885001.DR; MPN: 0885001.DR; VOLTAGE: 500V
J1-J10 = HyTechDevices; DKPN: 436500214; MANUFACTURER: Molex; MOPN: 538-43650-0214; MPN: 436500214
J100-J121 = HyTechDevices; DKPN: 36-5222-ND; MANUFACTURER: Keystone Electronics; MODEL: SPRING; MOPN: 534-5222; MPN: 5222
L1 L2 = HyTechDevices; CURRENT_RATED: 0.6A; CURRENT_SATURATION: 0.15A; DCR: 0.19Ω; DKPN: 732-1410-1-ND; INDUCTANCE: 33µH; MANUFACTURER: Würth Elektronik; MOPN: 710-74451133; MPN: 74451133; TOLERANCE: 20%
R3-R11 R27 R28 = HyTechDevices; RESISTANCE: DNP
R12-R15 = HyTechDevices; DKPN: 311-22.0HRCT-ND; MANUFACTURER: Yageo; MOPN: 603-RC0603FR-0722RL; MPN: RC0603FR-0722RL; POWER: 0.1W; RESISTANCE: 22; TOLERANCE: 1%; VOLTAGE_CONTINUOUS: 1.48V; VOLTAGE_MAX: 75V
R20 R21 = HyTechDevices; DKPN: 311-402HRCT-ND; MANUFACTURER: Yageo; MOPN: 603-RC0603FR-07402RL; MPN: RC0603FR-07402RL; POWER: 0.1W; RESISTANCE: 402; TOLERANCE: 1%; VOLTAGE_CONTINUOUS: 6.34V; VOLTAGE_MAX: 75V
R29 R33 = HyTechDevices; DKPN: P470BYCT-ND; MANUFACTURER: Panasonic Electronic Components; MOPN: 667-ERJ-PA3F4700V; MPN: ERJ-PA3F4700V; POWER: 0.25W; RESISTANCE: 470; TOLERANCE: 1%; VOLTAGE_CONTINUOUS: 10.84V; VOLTAGE_MAX: 150V
R31 R32 = HyTechDevices; DKPN: 311-374KHRCT-ND; MANUFACTURER: Yageo; MOPN: 603-RC0603FR-07374KL; MPN: RC0603FR-07374KL; POWER: 0.1W; RESISTANCE: 374k; TOLERANCE: 1%; VOLTAGE_CONTINUOUS: 75V; VOLTAGE_MAX: 75V
R36 R38 R39 R42 R48-R51 = HyTechDevices; DKPN: P20020CT-ND; MANUFACTURER: Panasonic Electronic Components; MOPN: 667-ERJ-PB3B2741V; MPN: ERJ-PB3B2741V; POWER: 0.2W; RESISTANCE: 2.74k; TOLERANCE: 0.1%; VOLTAGE_CONTINUOUS: 23.41V; VOLTAGE_MAX: 150V
T1 = HyTechDevices; DKPN: 1840-1036-1-ND; MANUFACTURER: Pulse Electronics; MOPN: 673-HM2112ZNLT; MPN: HM2112ZNLT
TP1-TP10 = HyTechDevices; DKPN: 36-5015CT-ND; MANUFACTURER: Keystone Electronics; MOPN: 534-5015; MPN: 5015
U1 U2 = HyTechDevices; DKPN: LTC6811IG-2#3ZZPBF-ND; MANUFACTURER: Analog Devices Inc.; MOPN: 584-6811IG-2#3ZZPB; MPN: LTC6811IG-2#3ZZPBF
U3 U4 = HyTechDevices; DKPN: 1649-1012-1-ND; MANUFACTURER: Sensirion AG; MOPN: 403-SHT31-ARP-B; MPN: SHT31-ARP-B
U5 U6 = HyTechDevices; DKPN: LT3990EMSE-5#PBF-ND; MANUFACTURER: Analog Devices Inc.; MOPN: 584-LT3990EMSE-5#PBF; MPN: LT3990EMSE-5#PBF
U$1-U$3 U$14-U$16 U$22-U$25 = HyTechDevices
U$4-U$13 U$17-U$21 U$100-U$104 = HyTechAesthetics

## Nets
C0L [Lower Power]: C14.1 R24.2 U2.26
C0U [Upper Power]: C3.1 R18.2 U1.26
C1L [Lower Power]: CELL1:C1.1 CELL1:R1.2 U2.24
C1U [Upper Power]: CELL13:C1.1 CELL13:R1.2 U1.24
C2L [Lower Power]: CELL2:C1.1 CELL2:R1.2 U2.22
C2U [Upper Power]: CELL14:C1.1 CELL14:R1.2 U1.22
C3L [Lower Power]: CELL3:C1.1 CELL3:R1.2 U2.20
C3U [Upper Power]: CELL15:C1.1 CELL15:R1.2 U1.20
C4L [Lower Power]: CELL4:C1.1 CELL4:R1.2 U2.18
C4U [Upper Power]: CELL16:C1.1 CELL16:R1.2 U1.18
C5L [Lower Power]: CELL5:C1.1 CELL5:R1.2 U2.16
C5U [Upper Power]: CELL17:C1.1 CELL17:R1.2 U1.16
C6L [Lower Power]: CELL6:C1.1 CELL6:R1.2 U2.14
C6U [Upper Power]: CELL18:C1.1 CELL18:R1.2 U1.14
C7L [Lower Power]: CELL7:C1.1 CELL7:R1.2 U2.12
C7U [Upper Power]: CELL19:C1.1 CELL19:R1.2 U1.12
C8L [Lower Power]: CELL8:C1.1 CELL8:R1.2 U2.10
C8U [Upper Power]: CELL20:C1.1 CELL20:R1.2 U1.10
C9L [Lower Power]: CELL9:C1.1 CELL9:R1.2 U2.8
C9U [Upper Power]: CELL21:C1.1 CELL21:R1.2 U1.2 U1.4 U1.6 U1.8
C10L [Lower Power]: CELL10:C1.1 CELL10:R1.2 U2.6
C11L [Lower Power]: CELL11:C1.1 CELL11:R1.2 U2.4
C12L [Lower Power]: CELL12:C1.1 CELL12:R1.2 U2.2
CC0 [Lower_Unfused]: F12.1 J100.1
CC1 [Lower_Unfused]: F21.1 J101.1
CC2 [Lower_Unfused]: F10.1 J112.1
CC3 [Lower_Unfused]: F20.1 J102.1
CC4 [Lower_Unfused]: F9.1 J113.1
CC5 [Lower_Unfused]: F23.1 J103.1
CC6 [Lower_Unfused]: F8.1 J114.1
CC7 [Lower_Unfused]: F19.1 J104.1
CC8 [Lower_Unfused]: F7.1 J115.1
CC9 [Lower_Unfused]: F18.1 J105.1
CC10 [Lower_Unfused]: F6.1 J116.1
CC11 [Lower_Unfused]: F17.1 J106.1
CC12 [Upper_Unfused]: F5.1 F11.1 J117.1
CC13 [Upper_Unfused]: F15.1 J107.1
CC14 [Upper_Unfused]: F4.1 J118.1
CC15 [Upper_Unfused]: F22.1 J108.1
CC16 [Upper_Unfused]: F3.1 J119.1
CC17 [Upper_Unfused]: F14.1 J109.1
CC18 [Upper_Unfused]: F2.1 J120.1
CC19 [Upper_Unfused]: F13.1 J110.1
CC20 [Upper_Unfused]: F1.1 J121.1
CC21 [Upper_Unfused]: F16.1 J111.1
CELL1:N$5: CELL1:Q1.1 CELL1:R2.1
CELL1:N$6: CELL1:D1.2 CELL1:Q1.3 CELL1:R3.2
CELL1:N$7: CELL1:D1.1 CELL1:R4.2
CELL2:N$5: CELL2:Q1.1 CELL2:R2.1
CELL2:N$6: CELL2:D1.2 CELL2:Q1.3 CELL2:R3.2
CELL2:N$7: CELL2:D1.1 CELL2:R4.2
CELL3:N$5: CELL3:Q1.1 CELL3:R2.1
CELL3:N$6: CELL3:D1.2 CELL3:Q1.3 CELL3:R3.2
CELL3:N$7: CELL3:D1.1 CELL3:R4.2
CELL4:N$5: CELL4:Q1.1 CELL4:R2.1
CELL4:N$6: CELL4:D1.2 CELL4:Q1.3 CELL4:R3.2
CELL4:N$7: CELL4:D1.1 CELL4:R4.2
CELL5:N$5: CELL5:Q1.1 CELL5:R2.1
CELL5:N$6: CELL5:D1.2 CELL5:Q1.3 CELL5:R3.2
CELL5:N$7: CELL5:D1.1 CELL5:R4.2
CELL6:N$5: CELL6:Q1.1 CELL6:R2.1
CELL6:N$6: CELL6:D1.2 CELL6:Q1.3 CELL6:R3.2
CELL6:N$7: CELL6:D1.1 CELL6:R4.2
CELL7:N$5: CELL7:Q1.1 CELL7:R2.1
CELL7:N$6: CELL7:D1.2 CELL7:Q1.3 CELL7:R3.2
CELL7:N$7: CELL7:D1.1 CELL7:R4.2
CELL8:N$5: CELL8:Q1.1 CELL8:R2.1
CELL8:N$6: CELL8:D1.2 CELL8:Q1.3 CELL8:R3.2
CELL8:N$7: CELL8:D1.1 CELL8:R4.2
CELL9:N$5: CELL9:Q1.1 CELL9:R2.1
CELL9:N$6: CELL9:D1.2 CELL9:Q1.3 CELL9:R3.2
CELL9:N$7: CELL9:D1.1 CELL9:R4.2
CELL10:N$5: CELL10:Q1.1 CELL10:R2.1
CELL10:N$6: CELL10:D1.2 CELL10:Q1.3 CELL10:R3.2
CELL10:N$7: CELL10:D1.1 CELL10:R4.2
CELL11:N$5: CELL11:Q1.1 CELL11:R2.1
CELL11:N$6: CELL11:D1.2 CELL11:Q1.3 CELL11:R3.2
CELL11:N$7: CELL11:D1.1 CELL11:R4.2
CELL12:N$5: CELL12:Q1.1 CELL12:R2.1
CELL12:N$6: CELL12:D1.2 CELL12:Q1.3 CELL12:R3.2
CELL12:N$7: CELL12:D1.1 CELL12:R4.2
CELL13:N$5: CELL13:Q1.1 CELL13:R2.1
CELL13:N$6: CELL13:D1.2 CELL13:Q1.3 CELL13:R3.2
CELL13:N$7: CELL13:D1.1 CELL13:R4.2
CELL14:N$5: CELL14:Q1.1 CELL14:R2.1
CELL14:N$6: CELL14:D1.2 CELL14:Q1.3 CELL14:R3.2
CELL14:N$7: CELL14:D1.1 CELL14:R4.2
CELL15:N$5: CELL15:Q1.1 CELL15:R2.1
CELL15:N$6: CELL15:D1.2 CELL15:Q1.3 CELL15:R3.2
CELL15:N$7: CELL15:D1.1 CELL15:R4.2
CELL16:N$5: CELL16:Q1.1 CELL16:R2.1
CELL16:N$6: CELL16:D1.2 CELL16:Q1.3 CELL16:R3.2
CELL16:N$7: CELL16:D1.1 CELL16:R4.2
CELL17:N$5: CELL17:Q1.1 CELL17:R2.1
CELL17:N$6: CELL17:D1.2 CELL17:Q1.3 CELL17:R3.2
CELL17:N$7: CELL17:D1.1 CELL17:R4.2
CELL18:N$5: CELL18:Q1.1 CELL18:R2.1
CELL18:N$6: CELL18:D1.2 CELL18:Q1.3 CELL18:R3.2
CELL18:N$7: CELL18:D1.1 CELL18:R4.2
CELL19:N$5: CELL19:Q1.1 CELL19:R2.1
CELL19:N$6: CELL19:D1.2 CELL19:Q1.3 CELL19:R3.2
CELL19:N$7: CELL19:D1.1 CELL19:R4.2
CELL20:N$5: CELL20:Q1.1 CELL20:R2.1
CELL20:N$6: CELL20:D1.2 CELL20:Q1.3 CELL20:R3.2
CELL20:N$7: CELL20:D1.1 CELL20:R4.2
CELL21:N$5: CELL21:Q1.1 CELL21:R2.1
CELL21:N$6: CELL21:D1.2 CELL21:Q1.3 CELL21:R3.2
CELL21:N$7: CELL21:D1.1 CELL21:R4.2
DRVL [Lower Power]: TP4.1 U2.38 U5.4
DRVU [Upper Power]: TP6.1 U1.38 U6.4
GPIO1L: C25.1 R35.2 U2.27
GPIO1U: C30.1 R44.2 U1.27
GPIO2L: C28.1 R41.2 U2.28
GPIO2U: C29.1 R45.2 U1.28
GPIO3L: C31.1 R46.2 U2.29
GPIO3U: C27.1 R40.2 U1.29
GPIO4L: C32.2 R47.1 U2.32
GPIO4U: C26.1 R37.2 U1.32
GPIO5L: C21.1 R28.1 R30.1 U2.33
GPIO5U: C16.1 R25.1 R27.1 U1.33
IM [IsoSPI]: J1.2 J2.2 R3.1 R12.1 R14.1 TP2.1
IML: C8.2 T1.9 U2.41
IMU: C6.2 T1.12 U1.41
IP [IsoSPI]: J1.1 J2.1 R3.2 R13.1 R15.1 TP1.1
IPL: R21.2 T1.7 U2.42
IPU: R20.2 T1.10 U1.42
N$1: R31.2 U6.16
N$2: D3.2 R34.1
N$3: C22.2 L1.1 U6.9
N$4: C22.1 U6.11
N$5: D2.2 R2.1
N$6: D1.2 R1.1
N$7: R32.2 U5.16
N$9: D4.2 R43.1
N$10: C18.2 L2.1 U5.9
N$11: C18.1 U5.11
N$12: R27.2 U3.1
N$18: C7.2 T1.11
N$22 [IsoSPI]: R12.2 T1.1
N$25: R8.2 R9.2 U1.46
N$27 [IsoSPI]: R13.2 T1.3
N$29: C9.2 T1.8
N$30: R25.2 U3.4
N$32 [IsoSPI]: R14.2 T1.4
N$33 [IsoSPI]: R15.2 T1.6
N$54: R10.2 R11.2 U1.47
N$61: R16.2 R19.2 U1.43
N$67: R4.2 R5.1 U2.46
N$68: R6.2 R7.2 U2.47
N$70: R19.1 U1.44
N$71: J3.2 R44.1 R49.1
N$72: R22.1 R26.2 U2.43
N$73: R22.2 U2.44
N$76: J4.2 R45.1 R48.1
N$78: J5.2 R39.1 R40.1
N$80: J6.2 R37.1 R38.1
N$81: R30.2 U4.1
N$83: R28.2 U4.4
N$84: J7.2 R35.1 R36.1
N$86: J8.2 R41.1 R42.1
N$88: J9.2 R46.1 R50.1
N$90: J10.2 R47.2 R51.2
N$97: C6.1 R20.1
N$99: C8.1 R21.1
S1L [Lower Power]: CELL1:R2.2 U2.25
S1U [Upper Power]: CELL13:R2.2 U1.25
S2L [Lower Power]: CELL2:R2.2 U2.23
S2U [Upper Power]: CELL14:R2.2 U1.23
S3L [Lower Power]: CELL3:R2.2 U2.21
S3U [Upper Power]: CELL15:R2.2 U1.21
S4L [Lower Power]: CELL4:R2.2 U2.19
S4U [Upper Power]: CELL16:R2.2 U1.19
S5L [Lower Power]: CELL5:R2.2 U2.17
S5U [Upper Power]: CELL17:R2.2 U1.17
S6L [Lower Power]: CELL6:R2.2 U2.15
S6U [Upper Power]: CELL18:R2.2 U1.15
S7L [Lower Power]: CELL7:R2.2 U2.13
S7U [Upper Power]: CELL19:R2.2 U1.13
S8L [Lower Power]: CELL8:R2.2 U2.11
S8U [Upper Power]: CELL20:R2.2 U1.11
S9L [Lower Power]: CELL9:R2.2 U2.9
S9U [Upper Power]: CELL21:R2.2 U1.9
S10L [Lower Power]: CELL10:R2.2 U2.7
S11L [Lower Power]: CELL11:R2.2 U2.5
S12L [Lower Power]: CELL12:R2.2 U2.3
SENSE1 [Lower Power]: CELL1:Q1.2 CELL1:R1.1 CELL2:R3.1 CELL2:R4.1 F21.2
SENSE2 [Lower Power]: CELL2:Q1.2 CELL2:R1.1 CELL3:R3.1 CELL3:R4.1 F10.2
SENSE3 [Lower Power]: CELL3:Q1.2 CELL3:R1.1 CELL4:R3.1 CELL4:R4.1 F20.2
SENSE4 [Lower Power]: CELL4:Q1.2 CELL4:R1.1 CELL5:R3.1 CELL5:R4.1 F9.2
SENSE5 [Lower Power]: CELL5:Q1.2 CELL5:R1.1 CELL6:R3.1 CELL6:R4.1 F23.2
SENSE6 [Lower Power]: CELL6:Q1.2 CELL6:R1.1 CELL7:R3.1 CELL7:R4.1 F8.2
SENSE7 [Lower Power]: CELL7:Q1.2 CELL7:R1.1 CELL8:R3.1 CELL8:R4.1 F19.2
SENSE8 [Lower Power]: CELL8:Q1.2 CELL8:R1.1 CELL9:R3.1 CELL9:R4.1 F7.2
SENSE9 [Lower Power]: CELL9:Q1.2 CELL9:R1.1 CELL10:R3.1 CELL10:R4.1 F18.2
SENSE10 [Lower Power]: CELL10:Q1.2 CELL10:R1.1 CELL11:R3.1 CELL11:R4.1 F6.2
SENSE11 [Lower Power]: CELL11:Q1.2 CELL11:R1.1 CELL12:R3.1 CELL12:R4.1 F17.2
SENSE12 [Lower Power]: CELL12:Q1.2 CELL12:R1.1 F11.2 R17.2 R29.1
SENSE13 [Upper Power]: CELL13:Q1.2 CELL13:R1.1 CELL14:R3.1 CELL14:R4.1 F15.2
SENSE14 [Upper Power]: CELL14:Q1.2 CELL14:R1.1 CELL15:R3.1 CELL15:R4.1 F4.2
SENSE15 [Upper Power]: CELL15:Q1.2 CELL15:R1.1 CELL16:R3.1 CELL16:R4.1 F22.2
SENSE16 [Upper Power]: CELL16:Q1.2 CELL16:R1.1 CELL17:R3.1 CELL17:R4.1 F3.2
SENSE17 [Upper Power]: CELL17:Q1.2 CELL17:R1.1 CELL18:R3.1 CELL18:R4.1 F14.2
SENSE18 [Upper Power]: CELL18:Q1.2 CELL18:R1.1 CELL19:R3.1 CELL19:R4.1 F2.2
SENSE19 [Upper Power]: CELL19:Q1.2 CELL19:R1.1 CELL20:R3.1 CELL20:R4.1 F13.2
SENSE20 [Upper Power]: CELL20:Q1.2 CELL20:R1.1 CELL21:R3.1 CELL21:R4.1 F1.2
SENSE21 [Upper Power]: CELL21:Q1.2 CELL21:R1.1 F16.2 R23.1 R33.1
V+L [Lower Power]: C1.1 R17.1 TP3.1 U2.1
V+U [Upper Power]: C10.1 R23.2 TP5.1 U1.1
V-L [Lower Power]: C1.2 C9.1 C11.2 C12.2 C13.2 C14.2 C17.2 C19.2 C21.2 C24.2 C25.2 C28.2 C31.2 C32.1 CELL1:C1.2 CELL1:R3.1 CELL1:R4.1 CELL2:C1.2 CELL3:C1.2 CELL4:C1.2 CELL5:C1.2 CELL6:C1.2 CELL7:C1.2 CELL8:C1.2 CELL9:C1.2 CELL10:C1.2 CELL11:C1.2 CELL12:C1.2 D1.1 D3.1 F12.2 R4.1 R6.1 R24.1 R26.1 R32.1 R36.2 R42.2 R50.2 R51.1 TP10.1 U2.30 U2.31 U2.45 U2.48 U4.2 U4.3 U4.7 U4.8 U4.PAD U5.8 U5.17
V-U [Upper Power]: C2.2 C3.2 C4.2 C5.2 C7.1 C10.2 C15.2 C16.2 C20.2 C23.2 C26.2 C27.2 C29.2 C30.2 CELL13:C1.2 CELL13:R3.1 CELL13:R4.1 CELL14:C1.2 CELL15:C1.2 CELL16:C1.2 CELL17:C1.2 CELL18:C1.2 CELL19:C1.2 CELL20:C1.2 CELL21:C1.2 D2.1 D4.1 F5.2 R8.1 R10.1 R16.1 R18.1 R31.1 R38.2 R39.2 R48.2 R49.2 TP9.1 U1.30 U1.31 U1.48 U3.2 U3.3 U3.7 U3.8 U3.PAD U6.8 U6.17
VINL: C17.1 R29.2 U5.6
VINU: C23.1 R33.2 U6.6
VREF1L [Lower Power]: C11.1 U2.35
VREF1U [Upper Power]: C5.1 U1.35
VREF2L [Lower Power]: C12.1 U2.34
VREF2U [Upper Power]: C4.1 U1.34
VREGL [Lower Power]: C13.1 C19.1 C24.1 J7.1 J8.1 J9.1 J10.1 L2.2 R1.2 R5.2 R7.1 R34.2 TP8.1 U2.36 U2.37 U2.40 U4.5 U5.1 U5.2 U5.13
VREGU [Upper Power]: C2.1 C15.1 C20.1 J3.1 J4.1 J5.1 J6.1 L1.2 R2.2 R9.1 R11.1 R43.2 TP7.1 U1.36 U1.37 U1.40 U1.45 U3.5 U6.1 U6.2 U6.13